# Altium PCB TestV01.PcbDoc
Units mm, origin at the board's own origin, x right, y up, seen from the top; angles counter-clockwise.
Board outline 55.63 x 51.69 mm, 2 copper layers (Top Layer, Bottom Layer); 41 components, 35 nets, 172 pads, 120 vias.
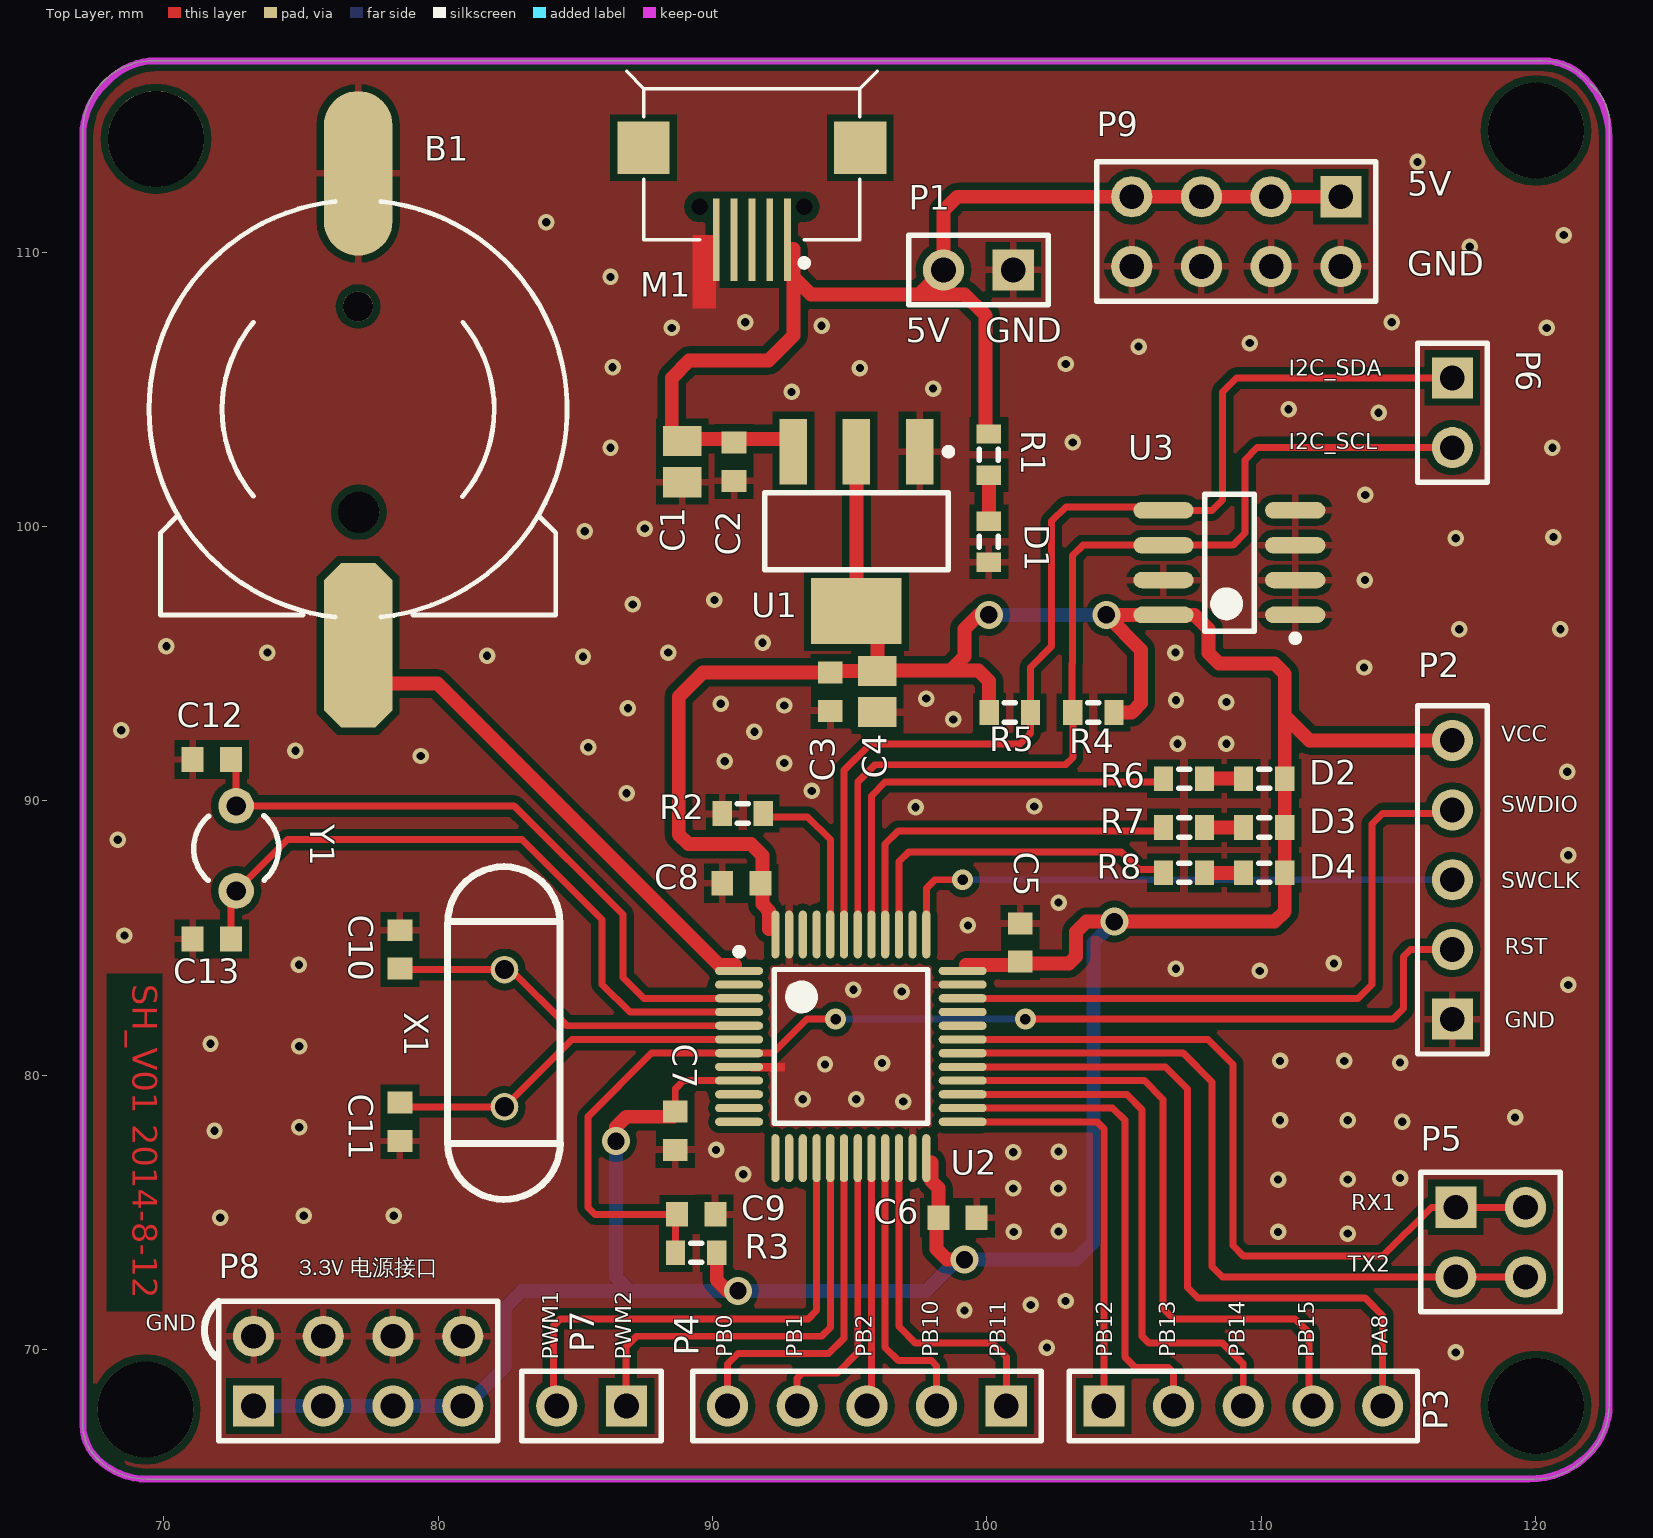
[diagram p0: Top Layer view]
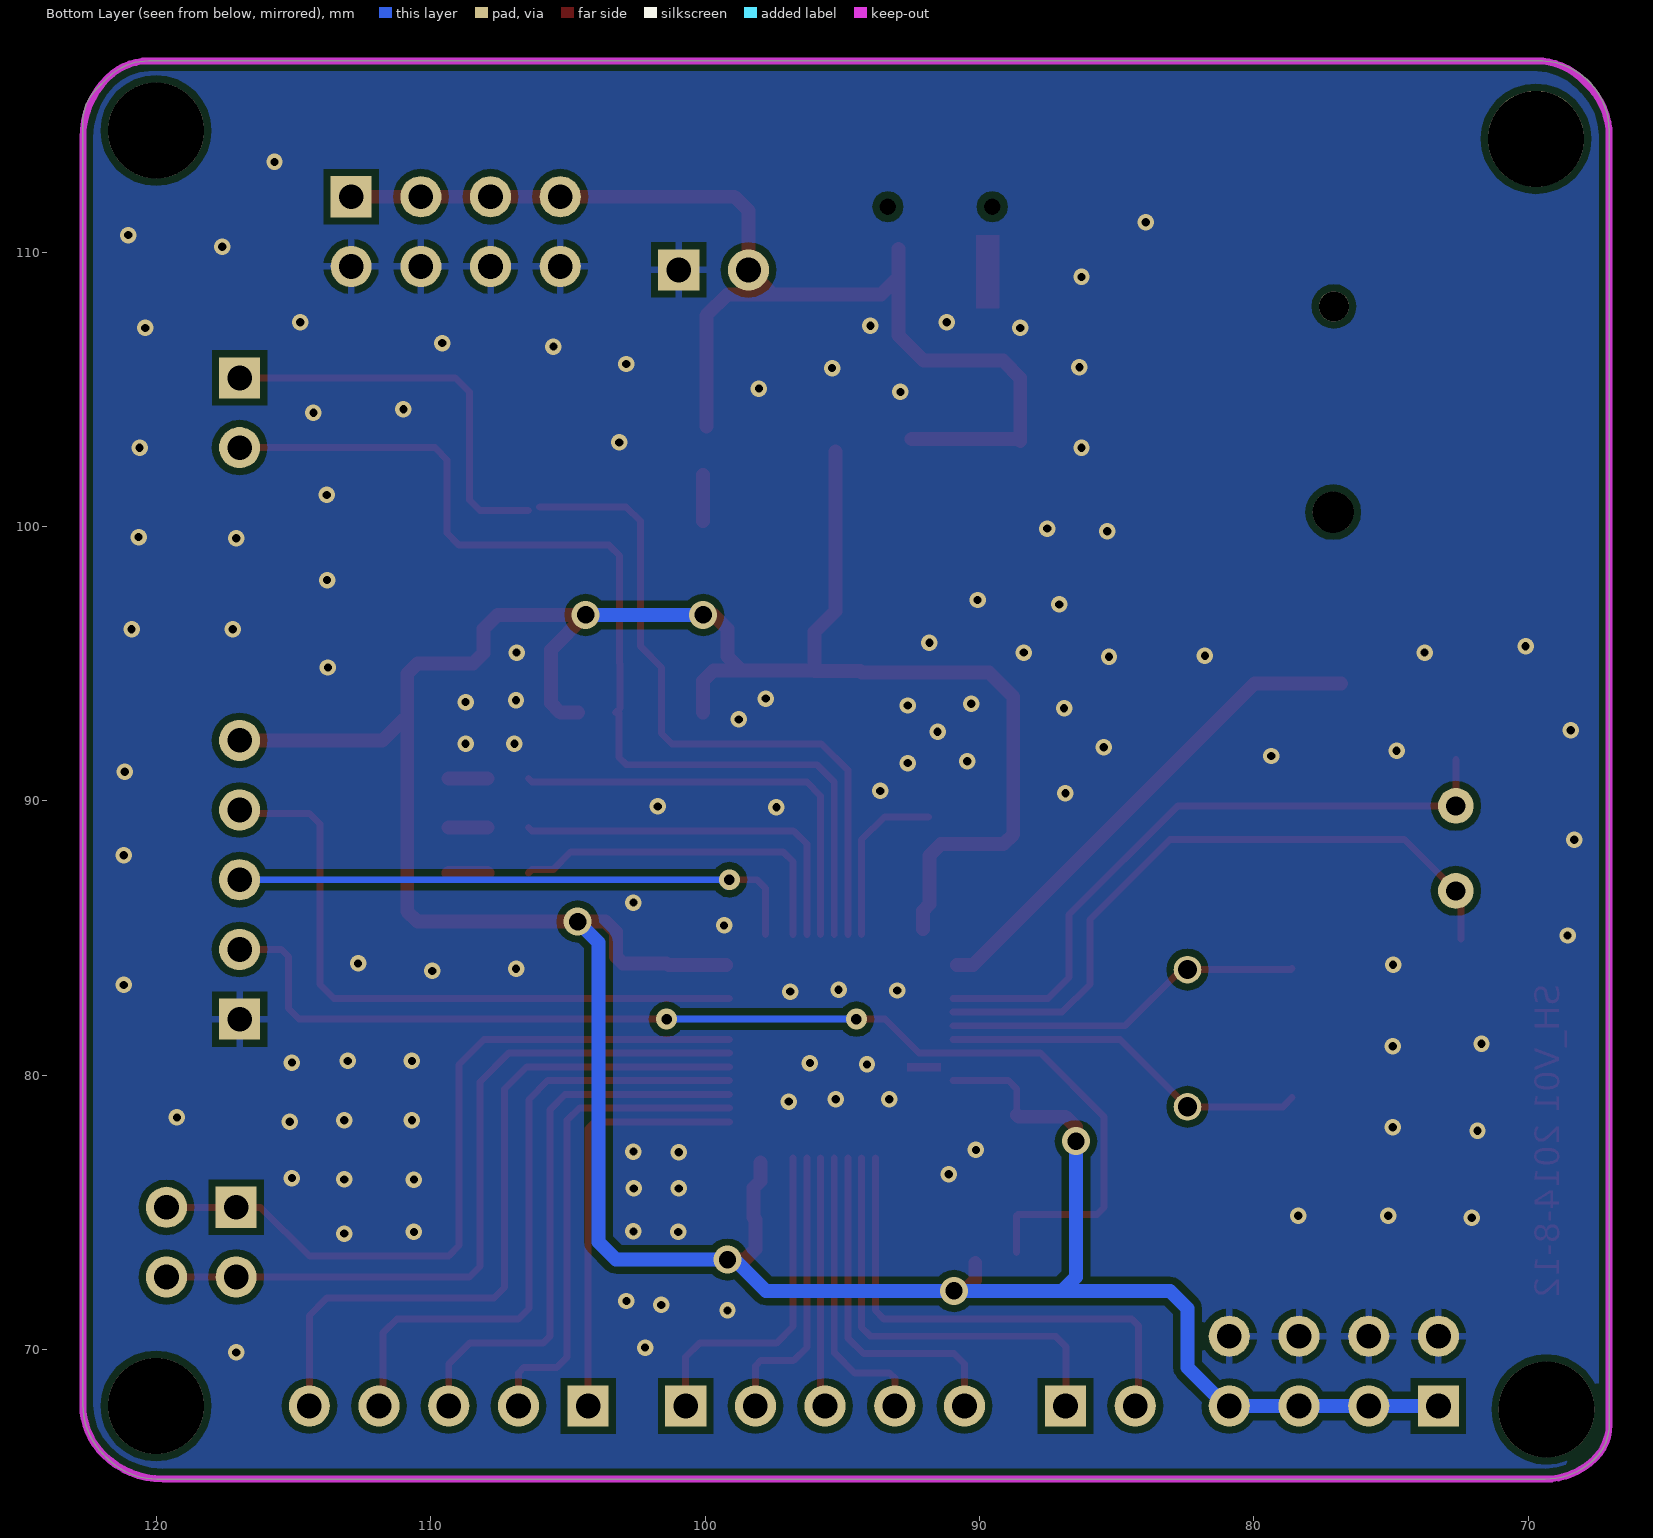
[diagram p1: Bottom Layer view, seen from below]

## Layer stack, top to bottom
Top Layer: signal copper 0.0356
Dielectric: dielectric 0.32, FR-4, Dk 4.8
Bottom Layer: signal copper 0.0356

## Board outline
69.469,116.967 120.273,116.967 cw(c120.273,114.83) 121.784,116.341 122.174,115.951 cw(c120.948,114.725) 122.682,114.725 122.682,67.994 122.682,67.981 cw(c120.142,67.981) 121.938,66.185 121.929,66.176 121.775,66.022 cw(c119.979,67.818) 119.979,65.278 119.761,65.278 69.378,65.278 cw(c69.378,67.818) 67.582,66.022 67.564,66.04 67.549,66.055 cw(c68.738,67.245) 67.056,67.245 67.056,114.229 67.056,114.427 cw(c69.596,114.427) 69.596,116.967 69.723,116.967

## Design rules (kind name [scope] priority, off if disabled: settings)
Clearance Clearance_polygon [inpolygon] p1: gap=0.254
Clearance [All] p2: gap=0.127
ComponentClearance [All] p1: gap=0 collisioncheckmode=3 verticalgap=0.254 showdistances=FALSE
PolygonConnect [All] p1: connectstyle=Relief reliefconductorwidth=0.254 reliefentries=4 polygonreliefangle="90 Angle" airgapwidth=0.254
RoutingVias [All] p1: holewidth=0.711 width=1.27 viastyle="Through Hole" minholewidth=0.711 minwidth=1.27 maxholewidth=0.711 maxwidth=1.27
SolderMaskExpansion [All] p1: expansion=0.102
Width [All] p1: maxlimit=0.762 minlimit=0.254 preferedwidth=0.254
27 further rules are at their usual default settings.

## Components (designator, comment, footprint, x,y, rotation, side; value= is the part's Value field where it differs from the comment)
B1 "BAT" BAT 77.343,104.521 r90 top
C1 "Cap Pol3" C0805 88.9,102.362 r270 top
C2 "Cap Semi" 1608[0603] 90.79,102.362 r90 top
C3 "Cap Semi" 1608[0603] 94.297,93.98 r90 top
C4 "Cap Pol3" C0805 96.012,93.98 r270 top
C5 "Cap Semi" 1608[0603] 101.219,84.836 r270 top
C6 "Cap Semi" 1608[0603] 98.933,74.803 r0 top
C7 "Cap Semi" 1608[0603] 88.646,77.978 r270 top
C8 "Cap Semi" 1608[0603] 91.059,86.995 r0 top
C9 "Cap Semi" 1608[0603] 89.408,74.93 r180 top
C10 "Cap Semi" 1608[0603] 78.613,84.582 r90 top
C11 "Cap Semi" 1608[0603] 78.613,78.301 r270 top
C12 "Cap Semi" 1608[0603] 71.755,91.505 r180 top
C13 "Cap Semi" 1608[0603] 71.755,84.963 r180 top
D1 "LED2" J1-0603 100.076,99.441 r270 top
D2 "LED2" J1-0603 110.109,90.805 r180 top
D3 "LED2" J1-0603 110.109,89.027 r180 top
D4 "LED2" J1-0603 110.109,87.376 r180 top
M1 "MicroUSB" microusb 91.948,112.903 r90 top
P1 "Header 2" HDR1X2 100.965,109.347 r180 top
P2 "SWD" HDR1X5 116.967,82.042 r90 top
P3 "Header 5" HDR1X5 104.267,67.945 r0 top
P4 "Header 5" HDR1X5 100.711,67.945 r180 top
P5 "Header 2X2" HDR2X2 117.094,75.184 r270 top
P6 "Header 2" HDR1X2 116.967,105.41 r270 top
P7 "Header 2" HDR1X2 86.868,67.945 r180 top
P8 "Header 4X2" HDR2X4 73.279,67.945 r0 top
P9 "Header 4X2" HDR2X4 112.903,112.014 r180 top
R1 "Res3" J1-0603 100.076,102.616 r90 top
R2 "Res3" J1-0603 91.107,89.535 r180 top
R3 "Res3" J1-0603 89.408,73.533 r0 top
R4 "Res3" J1-0603 103.886,93.218 r0 top
R5 "Res3" J1-0603 100.838,93.218 r180 top
R6 "Res3" J1-0603 107.188,90.805 r180 top
R7 "Res3" J1-0603 107.188,89.027 r180 top
R8 "Res3" J1-0603 107.188,87.376 r180 top
U1 "LM1117IMP-3.3" MP04A_N 95.25,99.822 r270 top
U2 "stm32f103c8t6" stm32f103t8 94.996,81.026 r0 top
U3 "AT24C64" SOIC-8N 108.839,98.679 r180 top
X1 "8M" xtal 82.423,81.28 r270 top
Y1 "32.768KHz" R38 72.644,88.265 r180 top

## Footprints (in the part's own frame and the unit in brackets; to place one, negate y for a bottom-side part, rotate by r counter-clockwise, add the part's x,y. Pads: shape width x height; smd on the part's side, far side on the other; paste and mask are expansions set on the pad)
1608[0603] [mm] "Chip Capacitor, Body 1.6x0.8mm, IPC High Density"
  rect 0.8x0.9 smd: 1(-0.7,0) 2(0.7,0)
  body extent -0.87,-0.48 0.87,0.48, height 1.3
BAT [mm]
  round 1.5 hole 1.5 unplated: 0(-4.004,0.229)
  round 1.1 hole 1.1 unplated: 0(3.496,0.254)
  oct 6x2.5 smd: 1(-8.854,0.254)
  oval 6x2.5 smd: 2(8.346,0.254)
  silkscreen extent -7.83,-7.36 7.32,7.87
C0805 [mm] "Chip Capacitor, Body 2.0x1.3mm, IPC High Density"
  rect 1.1x1.4 smd: 1(-0.75,0) 2(0.75,0)
  body extent -1.1,-0.72 1.1,0.72, height 1.4
HDR1X2 [mm] "Connector; Header; 2 Position"
  rect 1.5x1.5 hole 0.9: 1(0,0)
  round 1.5 hole 0.9: 2(2.54,0)
  silkscreen extent -1.27,-1.27 3.81,1.27
HDR1X5 [mm] "Connector; Header; 5 Position"
  rect 1.5x1.5 hole 0.9: 1(0,0)
  round 1.5 hole 0.9: 2(2.54,0) 3(5.08,0) 4(7.62,0) 5(10.16,0)
  silkscreen extent -1.27,-1.27 11.43,1.27
HDR2X2 [mm] "Connector; Header; 2x2 Position"
  rect 1.5x1.5 hole 0.9: 1(0,0)
  round 1.5 hole 0.9: 2(0,2.54) 3(2.54,0) 4(2.54,2.54)
  silkscreen extent -1.27,-1.27 3.81,3.81
HDR2X4 [mm] "Connector; Header; 4x2 Position"
  rect 1.5x1.5 hole 0.9: 1(0,0)
  round 1.5 hole 0.9: 2(0,2.54) 3(2.54,0) 4(2.54,2.54) 5(5.08,0) 6(5.08,2.54) 7(7.62,0) 8(7.62,2.54)
  silkscreen extent -1.27,-1.27 8.89,3.81
J1-0603 [mm] "Chip Resistor, Body 1.6x0.8mm, IPC High Density"
  rect 0.7x0.9 smd: 1(-0.75,0) 2(0.75,0)
  silkscreen extent -0.2,-0.35 0.2,0.35, body extent -0.85,-0.48 0.85,0.48, height 0.9
microusb [mm]
  rect 3x0.25 smd: 1(-2.46,1.808) 2(-2.46,1.158) 3(-2.46,0.508) 4(-2.46,-0.142) 5(-2.46,-0.792)
  round 0 hole 0.6: MH1(-1.252,2.408) MH2(-1.252,-1.392)
  rect 1.9x1.9 smd: ""(0.898,4.458) ""(0.898,-3.442)
  silkscreen extent -3.42,-4.06 3.68,5.07
MP04A_N [mm] "SOT223, 4-Leads, Body 6.5x3.5mm, Pitch 2.3mm, Lead Span 7mm, IPC Medium Density"
  rect 2.4x1 smd: 1(-2.9,2.3) 2(-2.9,0) 3(-2.9,-2.3)
  rect 2.4x3.3 smd: 4(2.9,0)
  silkscreen extent -3.02,-3.35 1.4,3.48, body extent -1.85,-3.35 1.85,3.35, height 1.8
R38 [mm] "Crystal, Thru-Hole; 2 Leads; Body 3.1 x 8.2 mm (Dia.xH)"
  round 1.3 hole 0.7: 1(0,1.55) 2(0,-1.55)
  silkscreen extent -1.55,-1.19 1.55,1.17
SOIC-8N [mm] "SOIC, 8-Leads, Body 5.0x4.0mm (max), Pitch 1.27mm, IPC Medium Density"
  oval 2.2x0.6 smd: 1(-2.4,1.905) 2(-2.4,0.635) 3(-2.4,-0.635) 4(-2.4,-1.905) 5(2.4,-1.905) 6(2.4,-0.635) 7(2.4,0.635) 8(2.4,1.905)
  silkscreen extent -2.53,-2.5 0.9,2.88, body extent -2,-2.5 2,2.5, height 2.65
stm32f103t8 [mm]
  oval 1.75x0.3 smd: 1(-4.024,2.775) 2(-4.024,2.275) 3(-4.024,1.775) 4(-4.024,1.275) 5(-4.024,0.775) 6(-4.024,0.275) 7(-4.024,-0.225) 8(-4.024,-0.725) 9(-4.024,-1.225) 10(-4.024,-1.725) 11(-4.024,-2.225) 12(-4.024,-2.725) 25(4.126,-2.725) 26(4.126,-2.225) 27(4.126,-1.725) 28(4.126,-1.225) 29(4.126,-0.725) 30(4.126,-0.225) 31(4.126,0.275) 32(4.126,0.775) 33(4.126,1.275) 34(4.126,1.775) 35(4.126,2.275) 36(4.126,2.775)
  oval 0.3x1.75 smd: 13(-2.699,-4.05) 14(-2.199,-4.05) 15(-1.699,-4.05) 16(-1.199,-4.05) 17(-0.699,-4.05) 18(-0.199,-4.05) 19(0.301,-4.05) 20(0.801,-4.05) 21(1.301,-4.05) 22(1.801,-4.05) 23(2.301,-4.05) 24(2.801,-4.05) 37(2.801,4.1) 38(2.301,4.1) 39(1.801,4.1) 40(1.301,4.1) 41(0.801,4.1) 42(0.301,4.1) 43(-0.199,4.1) 44(-0.699,4.1) 45(-1.199,4.1) 46(-1.699,4.1) 47(-2.199,4.1) 48(-2.699,4.1)
  silkscreen extent -4.15,-2.77 2.85,3.6, body extent -3.45,-3.47 3.55,3.53, height 1.6
xtal [mm]
  oval 1.004x1.009 hole 0.7: 1(-2.568,0) 2(2.432,0)
  silkscreen extent -6.32,-2.07 5.81,2.03

## Part data
C1 C4: "Polarized Capacitor (Surface Mount)"
C2 C3 C5 C6 C7 C8 C9 C10 C11 C12 C13: "Capacitor (Semiconductor SIM Model)"
D1 D2 D3 D4: "Typical RED, GREEN, YELLOW, AMBER GaAs LED"
P1 P6 P7: "Header, 2-Pin"
P2: library part "Header 5", "Header, 5-Pin"
P3 P4: "Header, 5-Pin"
P5: "Header, 2-Pin, Dual row"
P8 P9: "Header, 4-Pin, Dual row"
R1 R2 R3 R4 R5 R6 R7 R8: "Resistor"
U1: "800mA Low-Dropout Linear Regulator, 4-pin SOT-223"
U2: library part stm32f103t8
X1: library part XTAL
Y1: library part XTAL, "Crystal Oscillator"

## Free pads (board coordinates)
  round 3.5 hole 3.5: 0(69.342,67.818) 0(69.723,114.126) 0(120.015,67.945) 0(120.015,114.427)

## Via types
v1: diameter 0.6, hole 0.3, Top Layer to Bottom Layer, 111 vias
v2: diameter 1.016, hole 0.635, Top Layer to Bottom Layer, 6 vias
v3: diameter 0.762, hole 0.381, Top Layer to Bottom Layer, 3 vias

## Nets (pads, with @x,y where several pads share a name; then routed paths per layer and width w, separated by ;. In a path a pad name is that pad's centre, name@x,y a point inside that pad or via, vN(x,y) a via of type N, cw(c..) or ccw(c..) an arc to the next point about the centre after c; other vN are vias at no path point)
GND: B1.2 C1.2 C2.1 C3.1 C4.2 C5.1 C6.2 C7.2 C8.1 C9.1 C10.2 C11.2 C12.2 C13.2 D1.2 M1.1 P1.1 P2.1 P8.2 P8.4 P8.6 P8.8 P9.2 P9.4 P9.6 P9.8 R2.2 U1.1 U2.8 U2.23 U2.35 U2.47 U3.1 U3.2 U3.3 U3.4 U3.7
  other v1: 117.094,69.897 102.192,70.073 99.187,71.426 101.6,71.628 102.87,71.77 113.157,74.226 100.984,74.289 102.618,74.307 110.617,74.289 72.067,74.803 75.103,74.88 78.386,74.88 100.965,75.871 102.607,75.871 110.617,76.197 113.157,76.2 115.062,76.25 91.127,76.389 100.965,77.191 102.618,77.216 90.133,77.278 71.854,77.978 74.942,78.105 115.143,78.301 110.688,78.359 113.157,78.359 119.253,78.459 96.954,79.039 93.294,79.121 95.242,79.121 94.104,80.391 96.185,80.443 115.062,80.459 110.688,80.518 113.03,80.518 74.942,81.051 71.709,81.144 96.901,83.046 93.001,83.085 95.139,83.111 121.188,83.288 109.945,83.801 106.891,83.882 74.93,84.021 112.649,84.074 68.571,85.09 99.314,85.459 102.618,86.291 121.188,88.011 68.326,88.583 97.406,89.767 101.727,89.796 86.871,90.271 93.617,90.359 121.158,91.059 92.618,91.375 90.453,91.444 79.375,91.632 74.803,91.821 85.474,91.948 106.955,92.075 108.734,92.075 91.533,92.518 68.453,92.569 98.775,92.964 86.92,93.369 92.618,93.472 90.306,93.534 108.734,93.599 106.896,93.661 97.79,93.726 113.748,94.857 85.284,95.25 81.788,95.289 73.785,95.4 88.392,95.4 106.875,95.4 70.104,95.631 91.828,95.758 117.221,96.252 120.904,96.252 87.1,97.155 90.072,97.317 113.78,98.044 117.094,99.568 120.65,99.61 85.344,99.822 87.536,99.919 113.792,101.149 86.286,102.87 120.615,102.87 103.136,103.062 114.278,104.14 110.998,104.267 92.885,104.902 98.043,105.022 95.377,105.769 86.36,105.798 102.876,105.918 105.531,106.553 109.58,106.68 88.519,107.234 120.408,107.234 93.98,107.315 91.195,107.442 114.759,107.442 86.286,109.093 117.602,110.19 121.03,110.617 83.947,111.086 115.697,113.284
GPIO1: P3.5 U2.29 | length 26.6
  Top Layer w0.254: U2.29 106.516,80.301 107.315,79.502 107.315,72.263 107.696,71.882 113.792,71.882 114.427,71.247 P3.5
GPIO2: P3.4 U2.28 | length 23.6
  Top Layer w0.254: U2.28 105.746,79.801 106.426,79.121 106.426,71.501 106.807,71.12 111.239,71.12 111.747,70.612 111.747,68.085 P3.4
GPIO3: P3.3 U2.27 | length 20.7
  Top Layer w0.254: U2.27 105.103,79.301 105.664,78.74 105.664,70.485 105.918,70.231 108.585,70.231 109.347,69.469 P3.3
GPIO4: P3.2 U2.26 | length 17.9
  Top Layer w0.254: U2.26 104.587,78.801 105.029,78.359 105.029,69.723 105.41,69.342 106.617,69.342 106.807,69.151 P3.2
GPIO5: P3.1 U2.25 | length 15.4
  Top Layer w0.254: U2.25 104.013,78.301 104.267,78.047 P3.1
GPIO6: P4.5 U2.18 | length 12.7
  Top Layer w0.254: P4.5 90.551,69.469 90.932,69.85 94.234,69.85 94.797,70.413 U2.18
GPIO7: P4.4 U2.19 | length 10.7
  Top Layer w0.254: P4.4 93.091,68.961 93.281,69.151 94.551,69.151 95.297,69.897 U2.19
GPIO8: P4.3 U2.20 | length 9.1
  Top Layer w0.254: P4.3 95.797,68.111 U2.20
GPIO9: P4.2 U2.21 | length 10.5
  Top Layer w0.254: U2.21 96.297,70.073 96.774,69.596 97.979,69.596 98.171,69.404 P4.2
GPIO10: P4.1 U2.22 | length 12.3
  Top Layer w0.254: U2.22 96.797,70.843 97.409,70.231 100.203,70.231 100.711,69.723 P4.1
I2C_SCL: P6.2 R4.1 U2.42 U3.6 | length 38.1
  Top Layer w0.254: U2.42 95.297,90.686 95.924,91.313 102.87,91.313 103.136,91.579 R4.1 ; R4.1@103.112,93.369 103.112,94.996 103.124,94.996 103.124,98.933 103.505,99.314 U3.6 108.966,99.314 109.41,99.758 109.41,102.425 109.855,102.87 P6.2 ; R4.1@103.2,93.282 R4.1@103.263,93.218
I2C_SDA: P6.1 R5.1 U2.43 U3.5 | length 40.1
  Top Layer w0.254: U2.43 94.797,91.114 95.758,92.075 101.207,92.075 101.588,92.456 R5.1 101.588,94.857 102.362,95.631 102.362,100.191 102.882,100.711 U3.5@106.045,100.711 ; U3.5 108.204,100.584 108.585,100.965 108.585,104.902 109.093,105.41 P6.1
LED1: R6.2 U2.41 | length 16
  Top Layer w0.254: U2.41 95.797,90.178 96.297,90.678 106.311,90.678 R6.2
LED2: R7.2 U2.40 | length 13.7
  Top Layer w0.254: U2.40 96.297,88.423 96.774,88.9 106.311,88.9 R7.2
LED3: R8.2 U2.39 | length 12.8
  Top Layer w0.254: U2.39 96.797,87.78 97.155,88.138 104.902,88.138 105.537,87.503 106.311,87.503 R8.2
NetD1_1: D1.1 R1.1 | length 1.7
  Top Layer w0.508: D1.1 R1.1
NetD2_2: D2.2 R6.1 | length 1.4
  Top Layer w0.508: R6.1 D2.2
NetD3_2: D3.2 R7.1 | length 1.4
  Top Layer w0.508: R7.1 D3.2
NetD4_2: D4.2 R8.1 | length 1.4
  Top Layer w0.508: R8.1 D4.2
NetR2_1: R2.1 U2.44 | length 6.2
  Top Layer w0.254: R2.1@91.857,89.408 93.472,89.408 94.297,88.583 U2.44
PWM1: P7.2 U2.16 | length 18.3
  Top Layer w0.254: P7.2@84.201,67.945 84.201,70.866 84.455,71.12 93.494,71.12 93.797,71.423 U2.16
PWM2: P7.1 U2.17 | length 16.1
  Top Layer w0.254: P7.1@86.741,67.945 86.855,68.059 86.855,70.104 87.236,70.485 93.98,70.485 94.297,70.802 U2.17
RST: C9.2 P2.2 R3.1 U2.7 | length 43
  Top Layer w0.254: R3.1 88.658,74.88 88.608,74.93 85.725,74.93 85.471,75.184 85.471,78.486 87.786,80.801 U2.7 92.202,80.801 93.443,82.042 v3(94.488,82.042) ; v3(101.408,82.042) 114.803,82.042 115.189,82.428 115.189,84.328 115.443,84.582 P2.2
  Bottom Layer w0.254: v3(94.488,82.042) v3@101.346,82.042
RX1: P5.1 P5.2 U2.31 | length 28.4
  Top Layer w0.254: U2.31 108.056,81.301 108.966,80.391 108.966,73.787 109.347,73.406 114.427,73.406 116.205,75.184 P5.1 P5.2
SWCLK: P2.3 U2.37 | length 20.9
  Top Layer w0.254: U2.37 97.797,86.813 98.106,87.122 98.806,87.122 v3@98.933,86.995
  Bottom Layer w0.254: v3@99.187,86.868 99.441,87.122 P2.3
  other v3: 99.122,87.122
SWDIO: P2.4 U2.34 | length 24.1
  Top Layer w0.254: U2.34 113.535,82.801 114.046,83.312 114.046,89.154 114.427,89.535 116.84,89.535 P2.4
TX1: P5.3 P5.4 U2.30 | length 27.5
  Top Layer w0.254: U2.30 107.159,80.801 108.204,79.756 108.204,73.025 108.585,72.644 P5.3@116.713,72.644 ; P5.3 P5.4
VBAT: B1.1 U2.1 | length 18.2
  Top Layer w0.508: B1.1@76.835,94.27 79.974,94.27 90.235,84.009 90.821,84.009
VCC-5: C1.1 C2.2 M1.5 P1.2 P9.1 P9.3 P9.5 P9.7 R1.2 U1.3 | length 44.3
  Top Layer w0.508: U1.3@92.483,103.189 88.596,103.189 88.519,103.112 88.519,105.41 89.154,106.045 92.043,106.045 92.95,106.952 92.95,109.093 ; 92.95,110.106 92.95,109.093 ; R1.2@99.949,103.632 99.949,107.696 99.187,108.458 97.536,108.458 ; P9.1 P9.3 P9.5 P9.7 98.933,112.014 98.425,111.506 P1.2 97.536,108.458 ; 92.95,109.093 93.585,108.458 97.536,108.458
VCC-33: C3.2 C4.1 C5.2 C6.1 C7.1 C8.2 D2.1 D3.1 D4.1 P2.5 P8.1 P8.3 P8.5 P8.7 R3.2 R4.2 R5.2 U1.2 U1.4 U2.9 U2.24 U2.36 U2.48 U3.8 | length 144.3
  Top Layer w0.254: C7.1@88.646,78.551 88.646,79.502 88.945,79.801 U2.9
  Top Layer w0.508: v2(86.487,77.597) 86.487,78.105 86.868,78.486 88.581,78.486 C7.1@88.646,78.551 ; R3.2@90.158,73.152 90.158,72.529 90.551,72.136 v2(90.932,72.136) ; 92.071,85.322 92.071,85.983 91.821,86.233 91.821,88.011 91.409,88.423 89.123,88.423 88.773,88.773 88.773,93.791 89.662,94.68 C3.2 94.347,94.73 C4.1 ; U1.2 U1.4 96.012,96.16 C4.1 ; 97.979,76.825 97.979,76.138 98.233,75.884 C6.1 98.171,74.741 98.171,73.66 98.552,73.279 v2(99.187,73.279) ; 99.249,84.009 101.346,84.009 101.408,84.074 102.997,84.074 103.251,84.328 103.251,85.217 103.632,85.598 v2(104.648,85.598) 110.49,85.598 110.859,85.967 D4.1 D3.1 D2.1 110.859,92.964 ; v2(100.076,96.774) 99.695,96.774 99.187,96.266 99.187,95.25 98.679,94.742 ; R5.2 100.076,93.23 100.076,94.361 99.695,94.742 98.679,94.742 ; R4.2 105.283,93.218 105.627,93.562 105.627,95.504 v2(104.357,96.774) U3.8 107.569,96.774 108.077,96.266 108.077,95.377 108.458,94.996 110.49,94.996 110.859,94.627 110.859,92.964 ; P2.5@116.713,92.202 111.76,92.202 110.998,92.964 110.859,92.964 ; C4.1 96.024,94.742 98.679,94.742
  Bottom Layer w0.508: P8.1 81.026,67.945 82.423,69.342 82.423,71.501 83.058,72.136 86.995,72.136 ; v2@86.487,77.47 86.487,72.644 86.995,72.136 ; v2(100.076,96.774) v2(104.357,96.774) ; v2(104.648,85.598) 103.886,84.836 103.886,73.914 103.251,73.279 v2(99.187,73.279) 98.933,73.279 97.79,72.136 v2(90.932,72.136) 86.995,72.136
XTAL1: C10.1 U2.5 X1.1 | length 13.2
  Top Layer w0.254: C10.1 78.647,83.848 X1.1 82.649,83.848 84.696,81.801 U2.5
XTAL2: C11.1 U2.6 X1.2 | length 13.5
  Top Layer w0.254: C11.1@78.613,79.186 78.951,78.848 X1.2 84.876,81.301 U2.6
XTAL3: C13.1 U2.4 Y1.1 | length 24.9
  Top Layer w0.254: C13.1 72.455,86.526 Y1.1 74.512,88.583 83.066,88.583 85.979,85.67 85.979,83.312 86.99,82.301 U2.4
XTAL4: C12.1 U2.3 Y1.2 | length 24.3
  Top Layer w0.254: C12.1@72.644,91.505 Y1.2 82.778,89.815 86.741,85.852 86.741,83.566 87.506,82.801 U2.3
pads on no net: B1.0 M1. M1.2 M1.3 M1.4 M1.MH1 M1.MH2 U2.2 U2.10 U2.11 U2.12 U2.13 U2.14 U2.15 U2.32 U2.33 U2.38 U2.45 U2.46

## Polygon pours and split planes (outlines as drawn)
GND on Top Layer "Top Layer-No Net" (solid, pour order 4): 66.929,117.221 67.056,117.348 122.682,117.348 122.682,65.532 122.174,65.024 122.047,65.151 67.183,65.151 67.183,116.586 66.675,117.094
GND on Bottom Layer "Top Layer-No Net" (solid, pour order 6): 66.675,117.348 122.809,117.348 122.809,65.151 122.682,65.024 122.555,65.151 67.056,65.151 67.056,117.094 66.802,117.348

## Keep-outs
Keep-Out Layer:
  lines w0.254: 67.056,67.245 67.056,114.229 ; 67.056,67.266 ccw(c68.79,67.266) 67.564,66.04 ccw(c69.404,67.88) 69.404,65.278 71.501,65.278 ; 67.056,113.411 67.056,114.229 ; 69.469,116.967 120.273,116.967 cw(c120.273,114.83) 121.784,116.341 cw(c119.616,114.173) 122.682,114.173 122.682,67.994 cw(c120.111,67.994) 121.929,66.176 cw(c119.761,68.344) 119.761,65.278 70.485,65.278 ; 69.723,116.967 ccw(c69.723,114.536) 68.004,116.255 67.818,116.069 ccw(c69.658,114.229) 67.056,114.229

## Other copper
Top Layer:
  rectangle net GND: 89.281,107.95 90.133,110.617
  rectangle net GND: 91.409,80.137 92.639,80.443
  text "SH_V01 2014-8-12" at 68.58,83.312 h1.52 r270

## Silkscreen, mask and mechanical layers (free items; w line width, h text height)
Top Overlay:
  lines w0.254: 71.9,69.735 cw(c72.811,70.699) 72.009,71.755
  text "5V" at 115.316,111.76 h1.52
  text "GND" at 115.316,108.839 h1.52
  text "GND" at 99.949,106.426 h1.52
  text "5V" at 97.047,106.411 h1.52
  text "I2C_SDA" at 110.998,105.283 h1
  text "I2C_SCL" at 110.998,102.616 h1
  text "VCC" at 118.744,91.948 h1
  text "SWDIO" at 118.744,89.377 h1
  text "SWCLK" at 118.744,86.614 h1
  text "RST" at 118.872,84.201 h1
  text "GND" at 118.872,81.534 h1
  text "RX1" at 113.284,74.88 h1
  text "TX2" at 113.157,72.644 h1
  text "3.3V 电源接口" at 74.93,72.517 h1
  text "GND" at 69.342,70.485 h1
  text "PB0" at 90.932,69.723 h1 r90
  text "PB1" at 93.472,69.723 h1 r90
  text "PB2" at 96.012,69.723 h1 r90
  text "PB10" at 98.425,69.723 h1 r90
  text "PB11" at 100.892,69.723 h1 r90
  text "PB12" at 104.775,69.723 h1 r90
  text "PB13" at 107.061,69.723 h1 r90
  text "PB14" at 109.601,69.723 h1 r90
  text "PB15" at 112.141,69.723 h1 r90
  text "PA8" at 114.808,69.723 h1 r90
  text "PWM1" at 84.582,69.627 h1 r90
  text "PWM2" at 87.249,69.627 h1 r90
Drill Drawing:
  text ".legend" at 67.31,30.734 h1.52